# EAGLE board PICKIT4-adaptor2 (EAGLE 7.7.0)
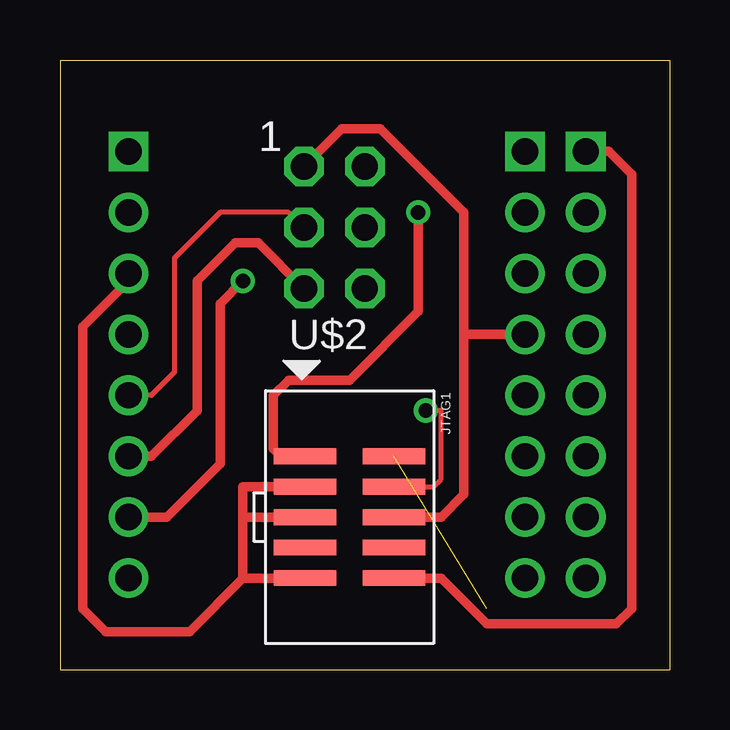
[diagram p0: board, top side]
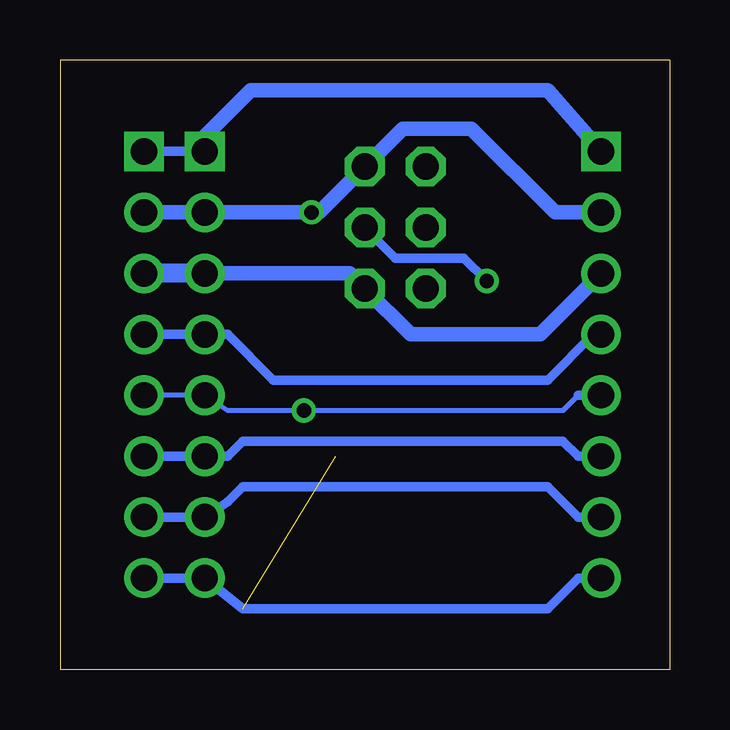
[diagram p1: board, bottom side, seen from below]

Size 25.4 x 25.4 mm. Coordinates in mm from the lower left corner, seen from the top.
Outline: 0,0 25.4,0 25.4,25.4 0,25.4 0,0
Copper layers (1*16): Top 0.035mm / dielectric 1.5mm / Bottom 0.035mm
Design rules "default": minimum track width 10mil, minimum drill 24mil, track to track 8mil, track to pad 8mil, pad to pad 8mil, via to via 8mil, smd to smd 8mil, copper to edge 40mil, drill to drill 8mil, minimum pad ring 10mil, minimum via ring 8mil, stop-mask expansion 4mil, vias tented up to drill 0mil, thermal gap 10mil
Net classes: 0 default: width 0.6 mm; 1 power: width 1 mm

## Footprints (pad centres in the part's own frame; a part is rotated, then mirrored left to right if it is on the bottom)
2X05_1.27MM_SMT = smd 0.65 x 2.6: 1 -2.54,-1.85; 2 -2.54,1.85; 3 -1.27,-1.85; 4 -1.27,1.85; 5 0,-1.85; 6 0,1.85; 7 1.27,-1.85; 8 1.27,1.85; 9 2.54,-1.85; 10 2.54,1.85
PINHEAD1X8 = drill 1.1 square: P$1 0,8.89 | drill 1.1: P$2 0,6.35; P$3 0,3.81; P$4 0,1.27; P$5 0,-1.27; P$6 0,-3.81; P$7 0,-6.35; P$8 0,-8.89
6PINS = drill 1.1 octagon: 1 -1.27,2.54; 2 1.27,2.54; 3 -1.27,0; 4 1.27,0; 5 -1.27,-2.54; 6 1.27,-2.54

## Placement (x,y rotation side)
JTAG1  [2X05_1.27MM_SMT]  12.06,6.35 270 top
U$1  PICKIT4PINHDR  [PINHEAD1X8]  2.86,12.7 0 top
U$2  AVR-ISP  [6PINS]  11.43,18.41 0 top
U$3  PICKIT4PINHDR  [PINHEAD1X8]  21.91,12.7 0 top
U$4  PICKIT4PINHDR  [PINHEAD1X8]  19.37,12.7 0 top

## Library data of the parts
JTAG1 = microbuilder
U$1 U$3 U$4 = mylib4
U$2 = Arduino-shield-scaffolds

## Nets
CLK: JTAG1.4 U$1.P$5 U$2.3 U$3.P$5 U$4.P$5
DATA: JTAG1.6 U$1.P$4 U$2.1 U$3.P$4 U$4.P$4
GND: JTAG1.3 JTAG1.5 JTAG1.9 U$1.P$3 U$2.6 U$3.P$3 U$4.P$3
TAUX: U$1.P$6 U$2.5 U$3.P$6 U$4.P$6
TTDI: U$1.P$7 U$2.4 U$3.P$7 U$4.P$7
TTMS: JTAG1.2 U$1.P$8 U$3.P$8 U$4.P$8
TVDD: JTAG1.1 U$1.P$2 U$2.2 U$3.P$2 U$4.P$2
VPP: JTAG1.10 U$1.P$1 U$3.P$1 U$4.P$1

## Tracks (layer width: path | path; a pad name or v marks a point on that pad's centre or on a via)
CLK  (via drill 0.6)
  Top 0.2: JTAG1.4 15.56,7.62 15.88,7.94 15.88,10.79 v15.24,10.79 | U$2.3 9.53,19.05 6.67,19.05 4.76,17.14 4.76,12.38 3.81,11.43 U$1.P$5
  Top 0.4: 3.17,11.43 U$1.P$5
  Bottom 0.2: 3.81,11.43 4.45,10.79 v15.24,10.79 18.41,10.79 U$4.P$5 U$3.P$5
  Bottom 0.4: U$1.P$5 3.81,11.43
DATA
  Top 0.4: U$2.1 11.75,22.54 13.34,22.54 16.83,19.05 16.83,13.97 | 16.83,13.97 U$4.P$4 | JTAG1.6 15.88,6.35 16.83,7.3 16.83,13.97
  Bottom 0.4: U$1.P$4 3.17,13.97 5.08,12.06 16.51,12.06 18.41,13.97 U$4.P$4 U$3.P$4
GND
  Top 0.4: JTAG1.9 7.62,3.81 | 7.62,3.81 5.4,1.59 1.91,1.59 0.95,2.54 0.95,14.29 2.86,16.19 U$1.P$3 | JTAG1.3 7.62,7.62 7.62,6.35 | 7.62,6.35 7.62,3.81 | JTAG1.5 7.62,6.35
  Bottom 0.6: U$1.P$3 5.4,13.97 10.79,13.97 U$2.6 13.34,16.51 U$4.P$3
  Bottom 0.8: U$4.P$3 U$3.P$3
TAUX
  Top 0.4: U$2.5 8.26,17.78 7.3,17.78 5.71,16.19 5.71,10.79 3.81,8.89 U$1.P$6
  Bottom 0.4: U$1.P$6 3.81,8.89 4.45,9.53 17.78,9.53 18.41,8.89 U$4.P$6 U$3.P$6
TTDI  (via drill 0.6)
  Top 0.4: v7.62,16.19 6.67,15.24 6.67,8.57 4.45,6.35 U$1.P$7
  Bottom 0.4: U$1.P$7 3.81,6.35 5.08,7.62 17.78,7.62 18.41,6.99 U$4.P$7 U$3.P$7 | U$2.4 11.43,17.14 8.57,17.14 v7.62,16.19
TTMS  (1 unrouted)
  Bottom 0.4: U$1.P$8 3.81,3.81 5.08,2.54 17.78,2.54 U$4.P$8 U$3.P$8
TVDD  (via drill 0.6)
  Top 0.4: JTAG1.1 9.21,8.89 8.89,9.21 8.89,11.43 9.53,12.06 12.06,12.06 14.92,14.92 v14.92,19.05
  Bottom 0.6: U$3.P$2 U$4.P$2 v14.92,19.05 14.61,19.05 U$2.2 11.11,22.54 8.26,22.54 4.76,19.05 U$1.P$2
VPP
  Top 0.4: JTAG1.10 15.88,3.81 17.78,1.91 23.18,1.91 23.81,2.54 23.81,20.64 22.86,21.59 U$3.P$1
  Bottom 0.4: U$4.P$1 U$3.P$1
  Bottom 0.6: U$1.P$1 5.08,24.13 17.46,24.13 19.37,22.23 U$4.P$1